# EAGLE board power (EAGLE 7.5.0)
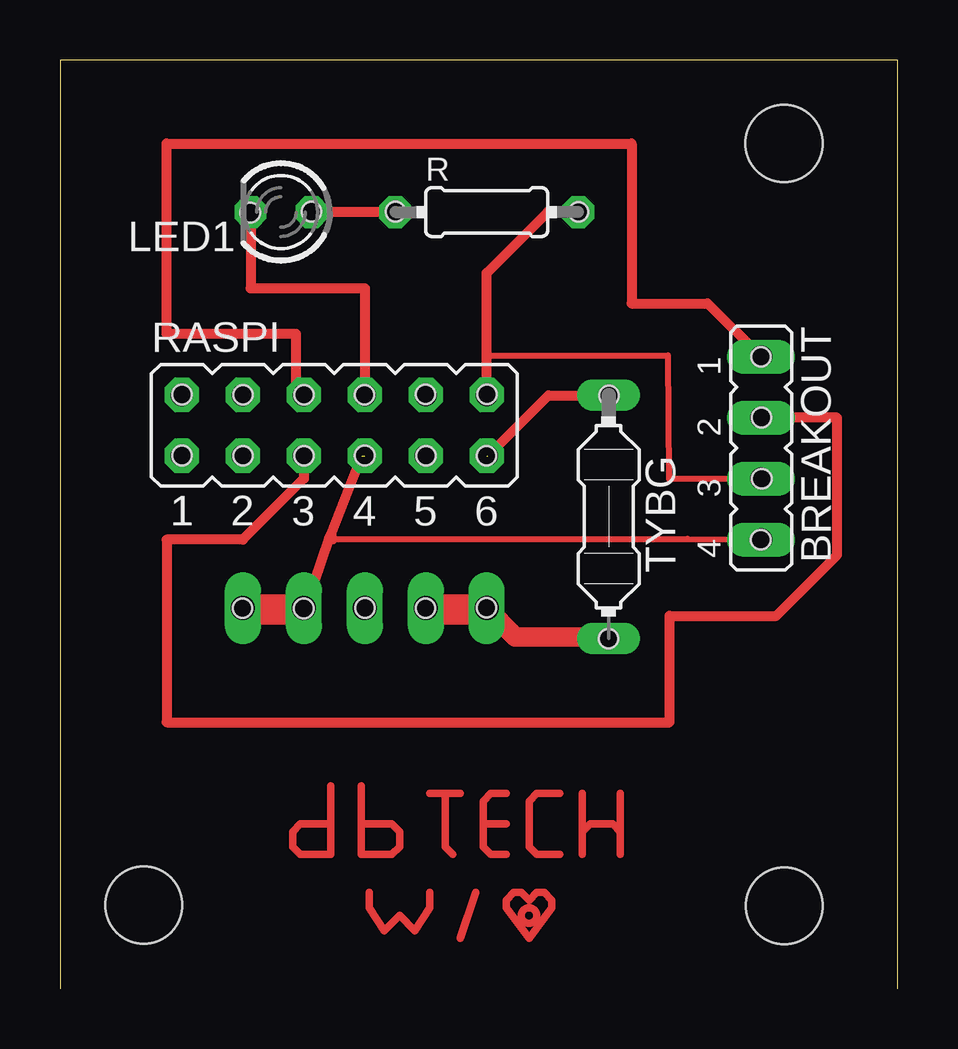
[diagram p0: board, top side]
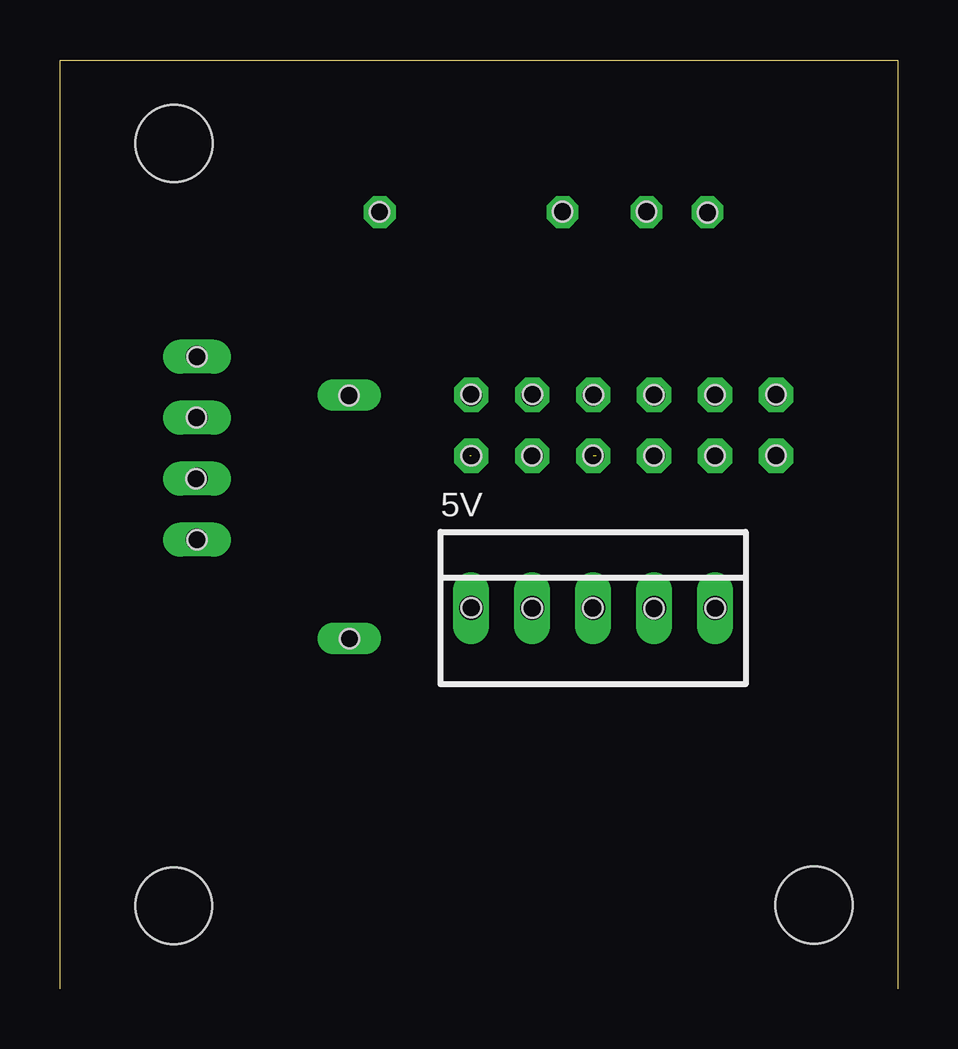
[diagram p1: board, bottom side, seen from below]

Size 34.91 x 38.73 mm. Coordinates in mm from the lower left corner, seen from the top.
Outline: 34.91,0 34.91,38.72 0,38.72 0,0
Copper layers (1*16): Top 0.035mm / dielectric 1.5mm / Bottom 0.035mm
Design rules "default": minimum track width 10mil, minimum drill 24mil, track to track 8mil, track to pad 8mil, pad to pad 8mil, via to via 8mil, smd to smd 8mil, copper to edge 40mil, drill to drill 8mil, minimum pad ring 10mil, minimum via ring 8mil, stop-mask expansion 4mil, vias tented up to drill 0mil, thermal gap 10mil
Holes 3.2 mm at 3.49,3.49 30.18,3.47 30.16,35.24
Holes 0.8 mm at 7.93,32.36 10.47,32.4 13.98,32.4 21.6,32.39 22.87,24.73 22.85,14.6 17.78,15.89 15.24,15.87 12.71,15.88 10.16,15.86 7.61,15.87 17.78,22.22 15.24,22.22 12.7,22.24 10.17,22.23 7.62,22.23 5.08,22.24 5.09,24.78 7.62,24.76 10.17,24.77 12.69,24.77 15.23,24.78 17.78,24.78 29.2,18.73 29.24,21.27 29.23,23.82 29.21,26.36

## Footprints (pad centres in the part's own frame; a part is rotated, then mirrored left to right if it is on the bottom)
22-23-2051 = drill 1 long: 1 -5.08,0; 2 -2.54,0; 3 0,0; 4 2.54,0; 5 5.08,0
JP4 = drill 0.914 long: 1 -3.81,0; 2 -1.27,0; 3 1.27,0; 4 3.81,0
LED3MM = drill 0.813 octagon: A -1.27,0; K 1.27,0
0204/7 = drill 0.813 octagon: 1 -3.81,0; 2 3.81,0
JP6Q = drill 0.914 octagon: 1 -6.35,-1.27; 2 -6.35,1.27; 3 -3.81,-1.27; 4 -3.81,1.27; 5 -1.27,-1.27; 6 -1.27,1.27; 7 1.27,-1.27; 8 1.27,1.27; 9 3.81,-1.27; 10 3.81,1.27; 11 6.35,-1.27; 12 6.35,1.27
PICOFUSE = drill 0.813 long: 1 -5.08,0; 2 5.08,0

## Placement (x,y rotation side)
5V  22-23-2051  [22-23-2051]  12.7,15.88 0 bottom
BREAKOUT  [JP4]  29.21,22.54 270 top
LED1  TLLR4400  [LED3MM]  9.21,32.38 180 top
R  [0204/7]  17.78,32.38 0 top
RASPI  [JP6Q]  11.43,23.49 0 top
TYBG  FUSEPICOFUSE  [PICOFUSE]  22.86,19.69 270 top

## Library data of the parts
5V = con-molex; MF: MOLEX; MPN: 22-23-2051; OC_FARNELL: 1462952; OC_NEWARK: 38C9178
BREAKOUT RASPI = jumper
LED1 = led; MF: VISHAY SEMICONDUCTOR; OC_FARNELL: 1612437
R = resistor
TYBG = fuse; OC_FARNELL: unknown; OC_NEWARK: unknown

## Nets
N$1: 5V.1 5V.2 TYBG.2
N$2: BREAKOUT.3 R.2 RASPI.12
N$3: LED1.A R.1
N$4: BREAKOUT.1 RASPI.6
N$5: RASPI.11 TYBG.1
N$6: 5V.4 5V.5 BREAKOUT.4 RASPI.7
N$7: BREAKOUT.2 RASPI.5
N$8: LED1.K RASPI.8

## Tracks (layer width: path | path; a pad name or v marks a point on that pad's centre or on a via)
N$1
  Top 0.254: 15.32,15.82 5V.2 | 17.6,15.82 5V.1 | 22.86,14.68 TYBG.2
  Top 0.813: 22.86,14.68 18.97,14.68 5V.1
  Top 1.27: 17.6,15.82 15.32,15.82
  Bottom 0.254: 22.86,14.68 TYBG.2
N$2
  Top 0.254: BREAKOUT.3 25.38,21.27 25.32,26.4 17.78,26.4
  Top 0.406: RASPI.12 17.78,26.4 17.78,29.85 20.32,32.38 R.2
N$3
  Top 0.406: R.1 LED1.A
N$4
  Top 0.406: RASPI.6 9.84,24.76 9.84,27.31 4.45,27.31 4.45,35.24 23.81,35.24 23.81,28.58 26.99,28.58 BREAKOUT.1
N$5  (1 unrouted)
  Top 0.254: 22.86,24.74 TYBG.1
  Top 0.406: 22.86,24.74 20.34,24.74 17.83,22.22
N$6  (1 unrouted)
  Top 0.254: 10.29,16.05 5V.4 10.06,15.82 | 7.77,15.82 5V.5 | BREAKOUT.4 26.15,18.76 11.32,18.76 11.41,18.67 11.39,18.99 11.21,18.73
  Top 0.406: 12.57,22.22 11.3,18.97 11.21,18.73 10.29,16.05
  Top 1.27: 10.06,15.82 7.77,15.82
N$7
  Top 0.406: RASPI.5 10.16,21.27 7.62,18.73 4.45,18.73 4.45,11.11 25.4,11.11 25.4,15.56 29.84,15.56 32.39,18.1 32.39,23.81 BREAKOUT.2
N$8
  Top 0.406: LED1.K 7.94,29.21 12.7,29.21 RASPI.8
S$1
  Top 0.305: 17.64,6.87 18.59,6.87 | 18.59,8.14 17.96,8.14 17.64,7.83 17.64,6.87 | 17.64,6.87 17.64,5.92 17.96,5.6 18.59,5.6
S$2
  Top 0.305: 20.81,8.14 19.86,8.14 19.54,7.83 19.54,5.92 19.86,5.6 20.81,5.6
S$3
  Top 0.305: 21.77,8.14 21.77,5.6
S$5
  Top 0.305: 11.29,8.46 11.29,6.87 | 11.29,6.87 11.29,5.6 10.02,5.6 9.7,5.92 9.7,6.56 10.02,6.87 11.29,6.87
S$7
  Top 0.305: 12.56,8.46 12.56,6.87 | 12.56,6.87 12.56,5.6 13.83,5.6 14.15,5.92 14.15,6.56 13.83,6.87 12.56,6.87
S$10
  Top 0.305: 12.88,4.02 12.88,3.38 13.51,2.43 14.15,3.06 14.78,2.43 15.42,3.38 15.42,4.02
S$11
  Top 0.305: 21.77,6.56 22.08,6.87 23.04,6.87 23.35,6.56 | 23.35,6.56 23.35,5.6 | 23.35,6.56 23.35,8.14
S$12
  Top 0.305: 16.05,8.14 16.05,5.92 16.37,5.6
S$13
  Top 0.305: 15.42,8.14 16.69,8.14
S$14
  Top 0.305: 16.69,2.11 17.32,4.02
S$15
  Top 0.305: 19.54,2.11 18.59,3.38 18.59,3.7 18.91,4.02 19.23,4.02 19.54,3.7 19.86,4.02 20.18,4.02 20.5,3.7 20.5,3.38 19.54,2.11
(copper drawn outside any net)
  shapes: Top circle x1